# Altium PCB corePCB.PcbDoc (part 1 of 2)
Units mil, origin at the board's own origin, x right, y up, seen from the top; angles counter-clockwise.
Board outline 3543.31 x 3543.31 mil, 4 copper layers (Top Layer, Layer 1, Layer 2, Bottom Layer), stack 23.756 mil thick; 90 components, 158 nets, 640 pads, 386 vias.
Unrouted connection lines stored in the file: 1.
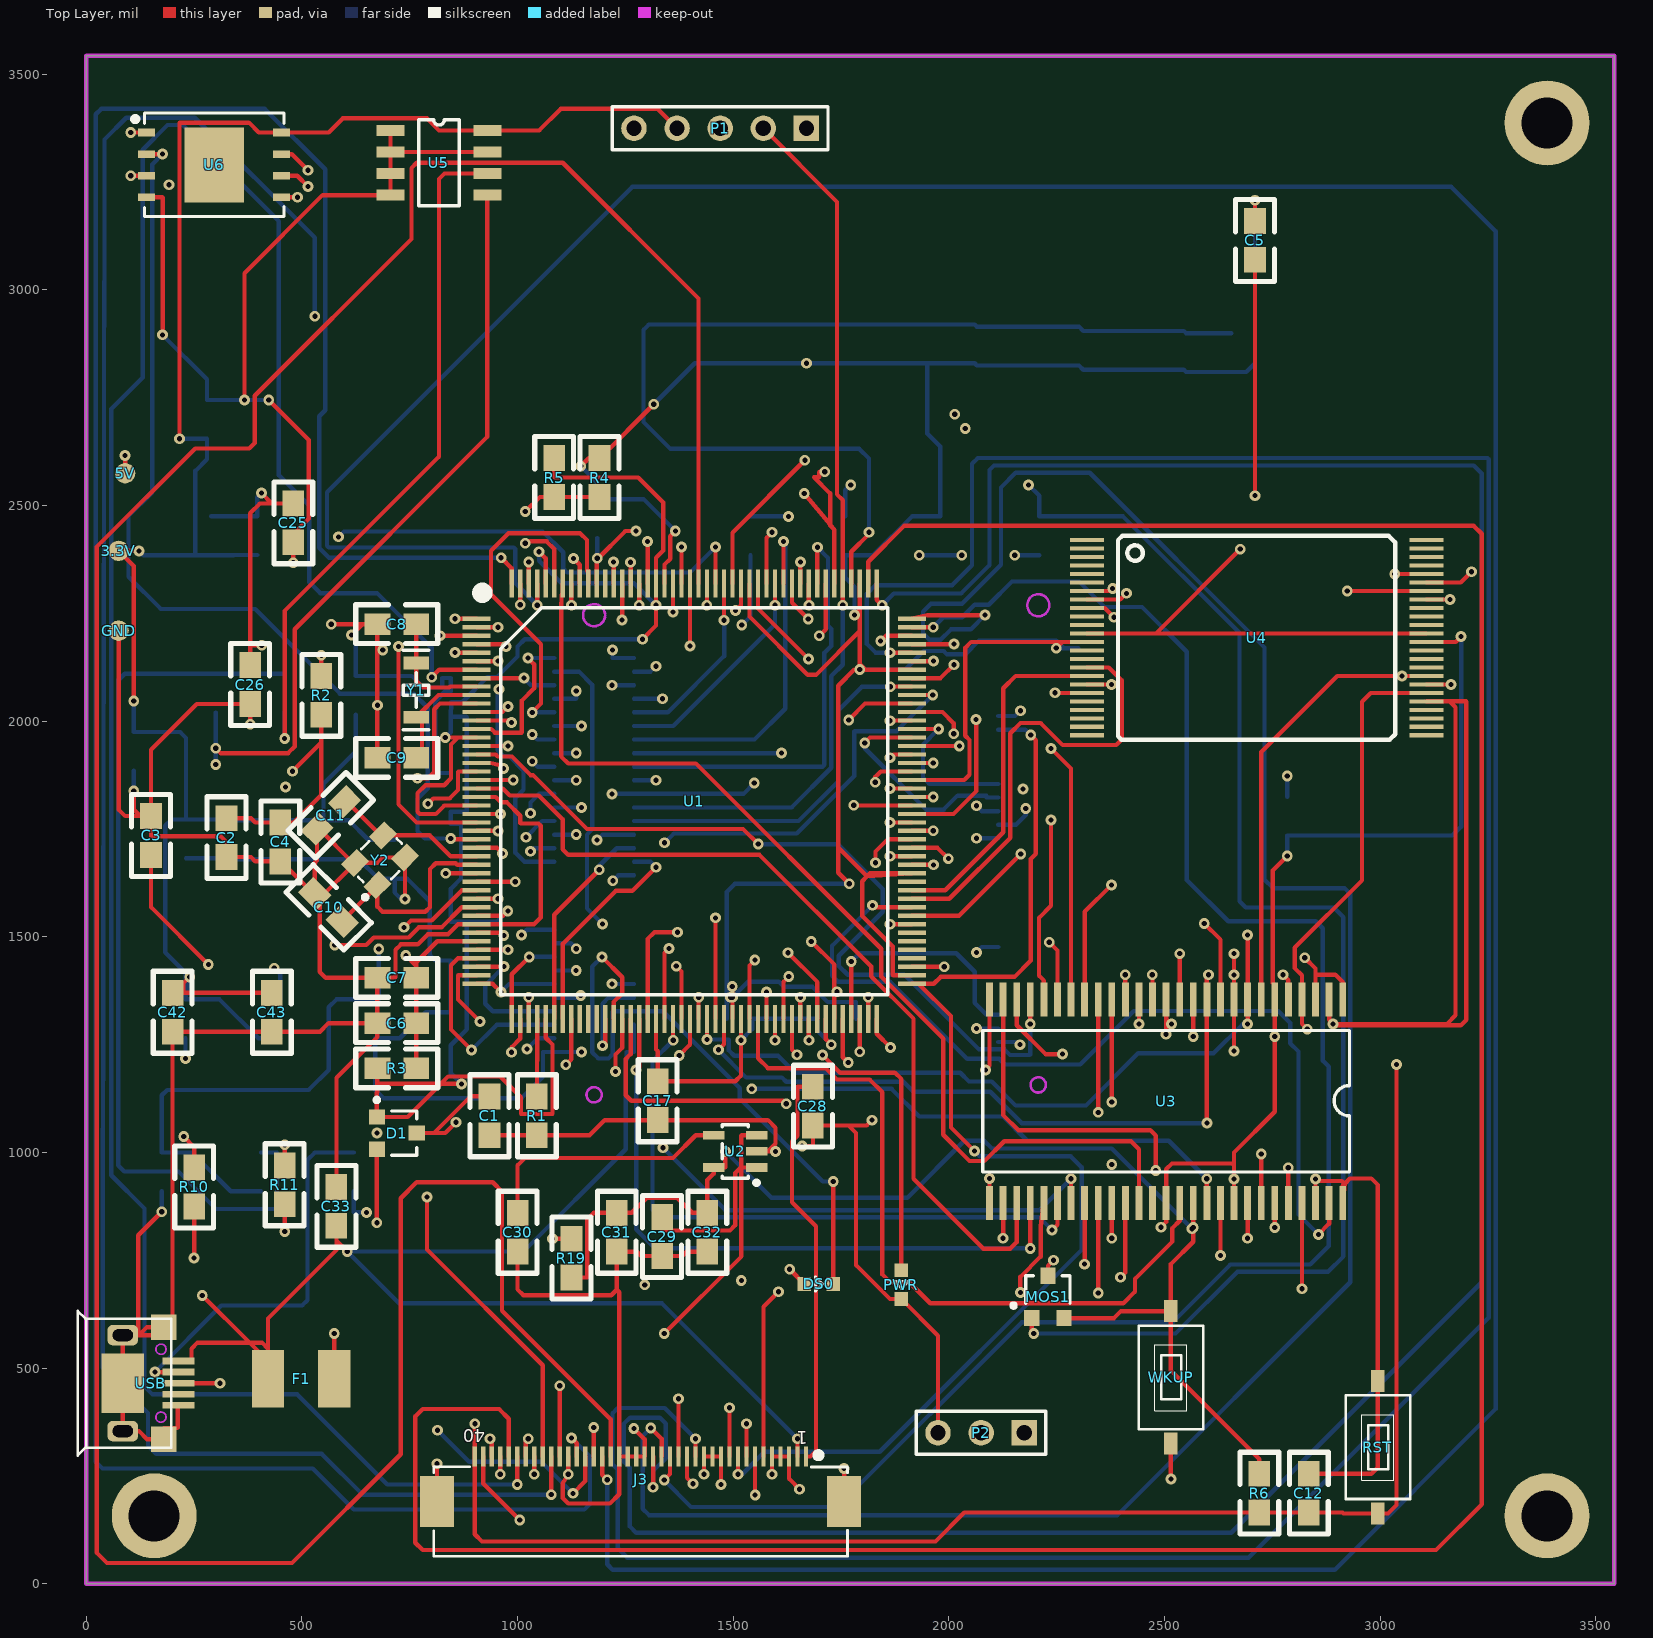
[diagram p0: Top Layer view]
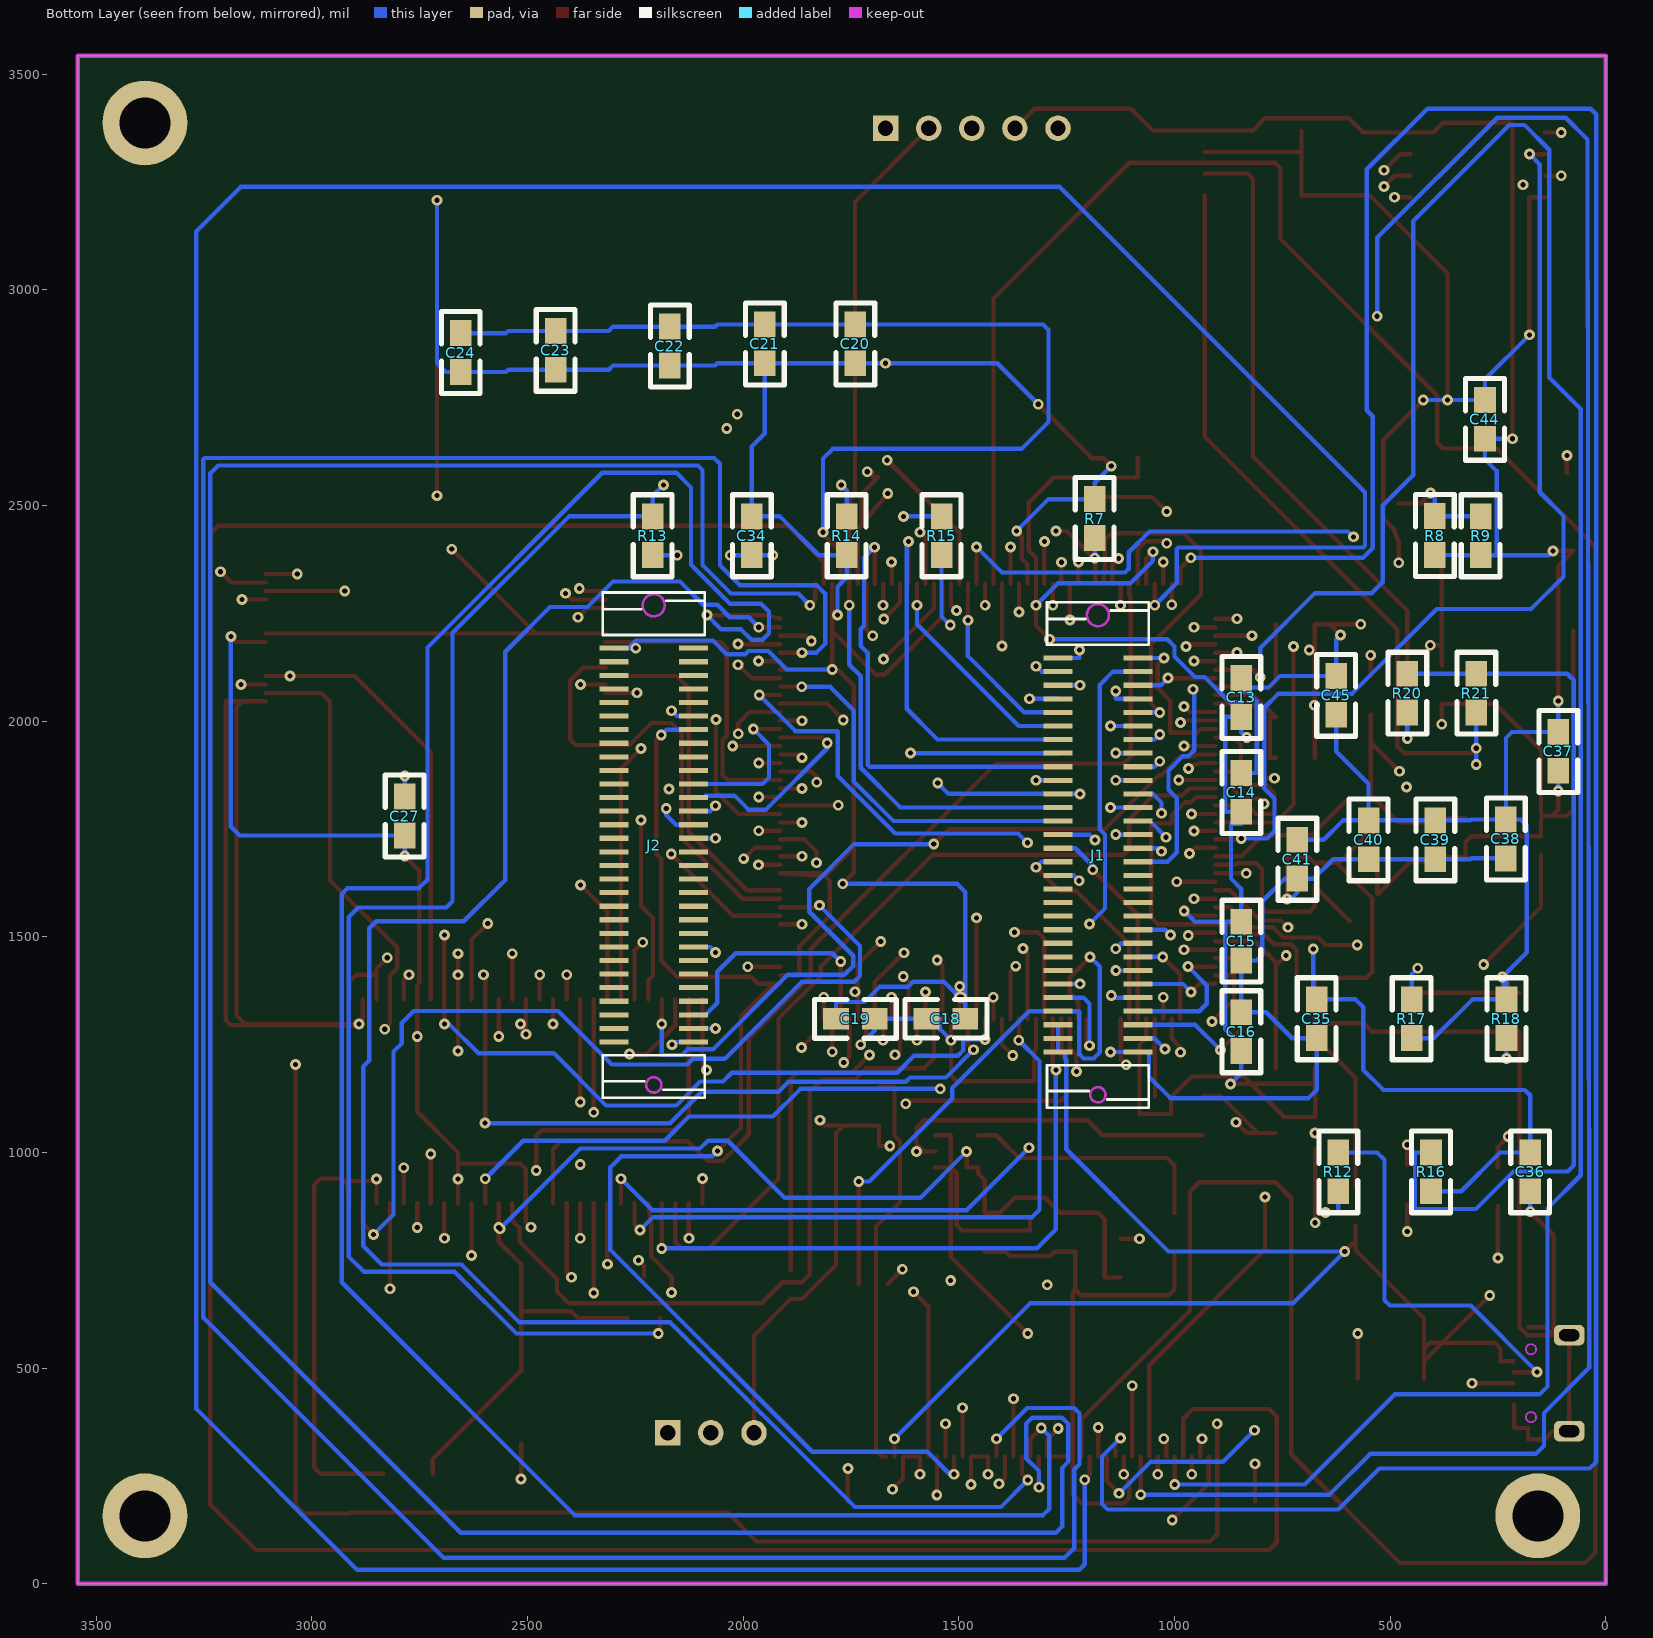
[diagram p1: Bottom Layer view, seen from below]
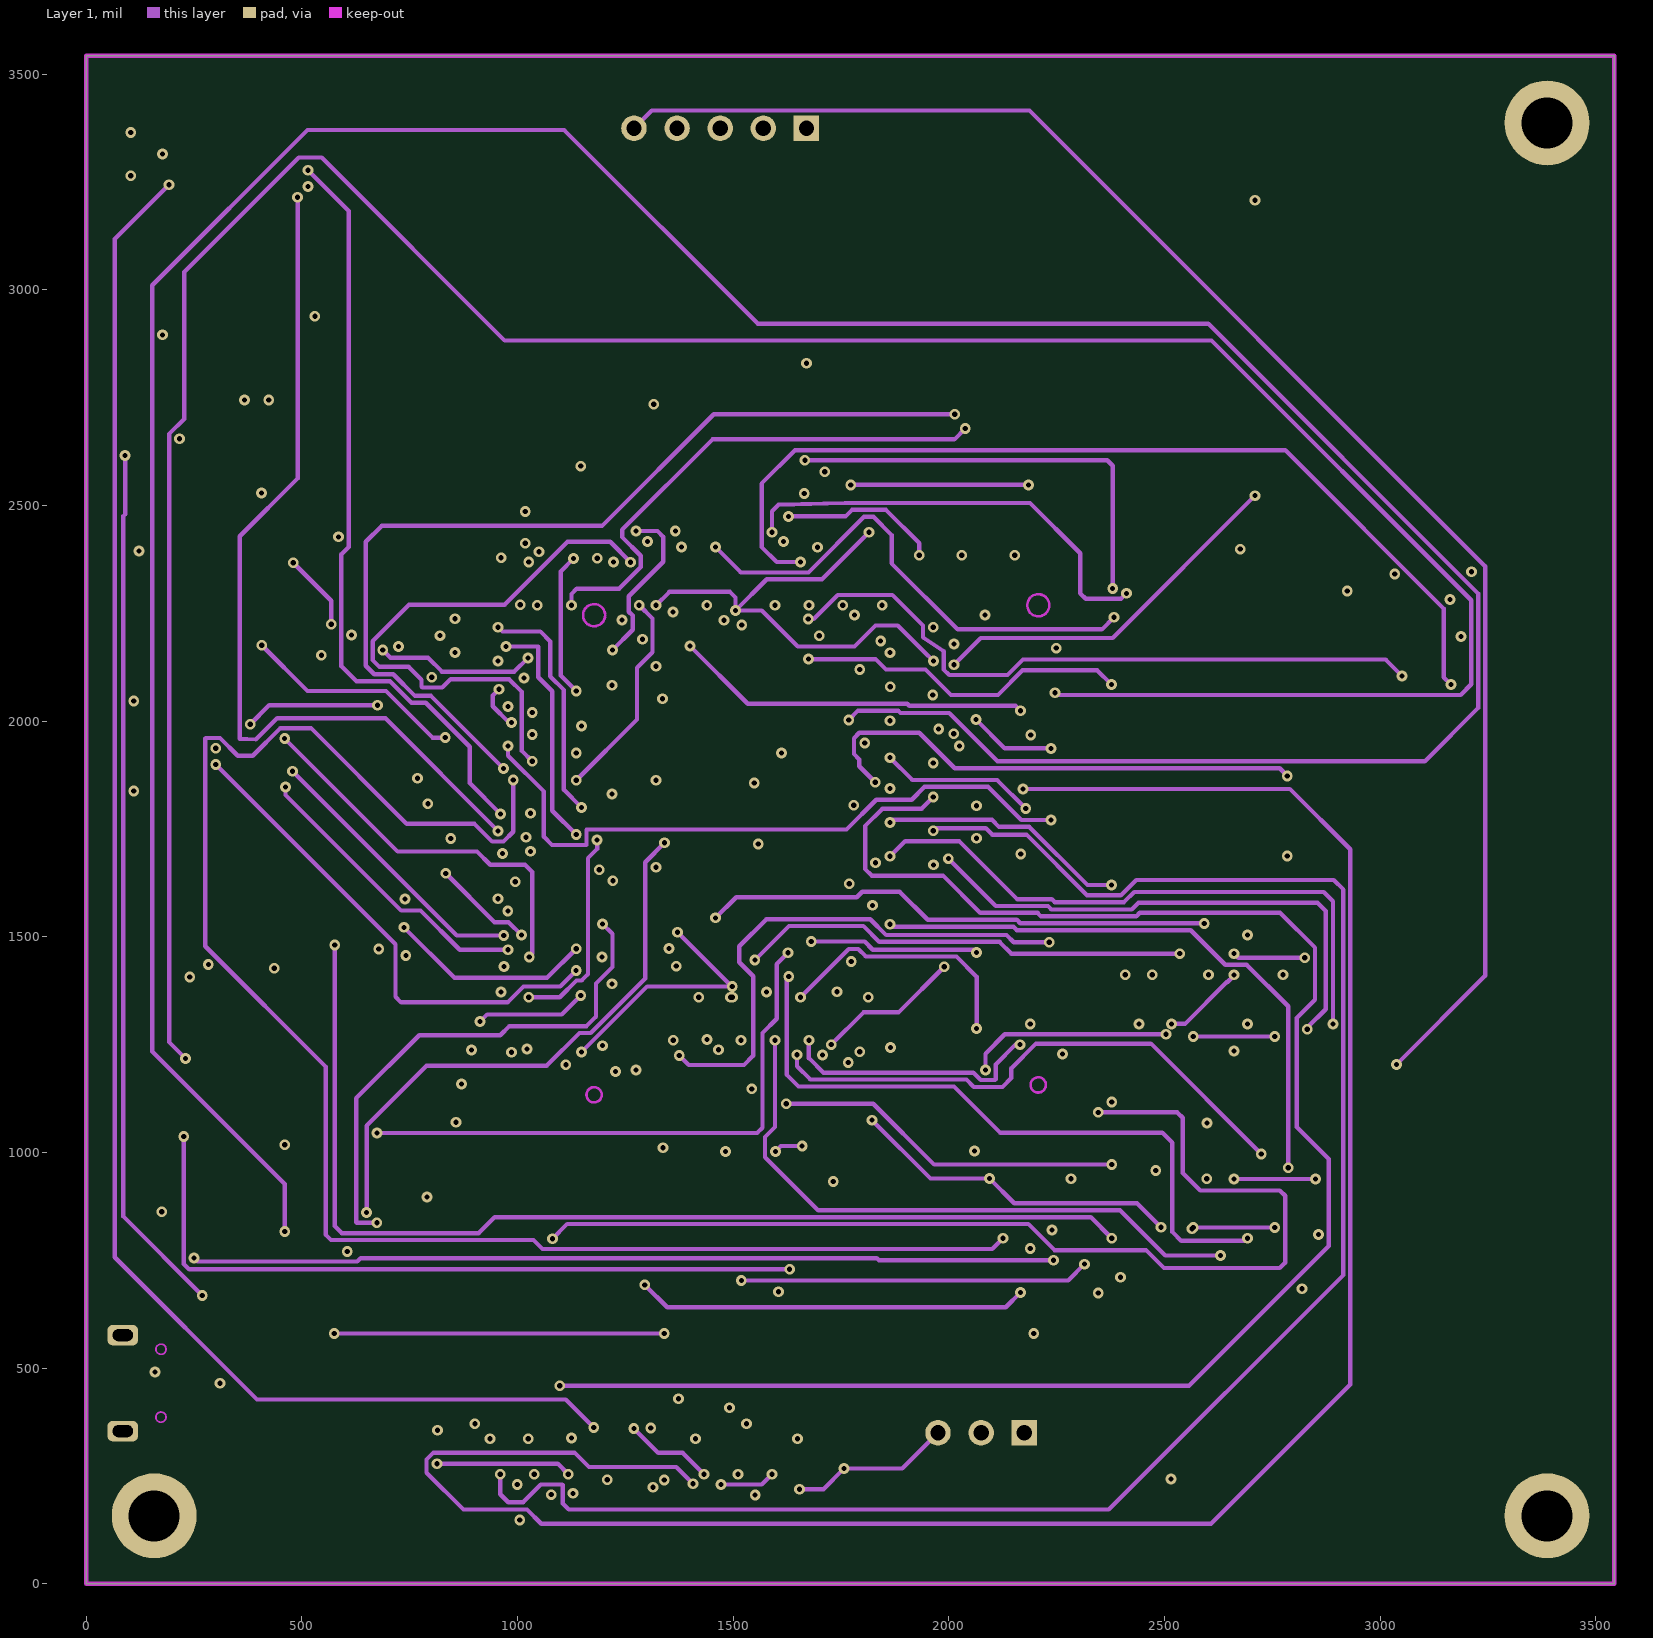
[diagram p2: Layer 1]
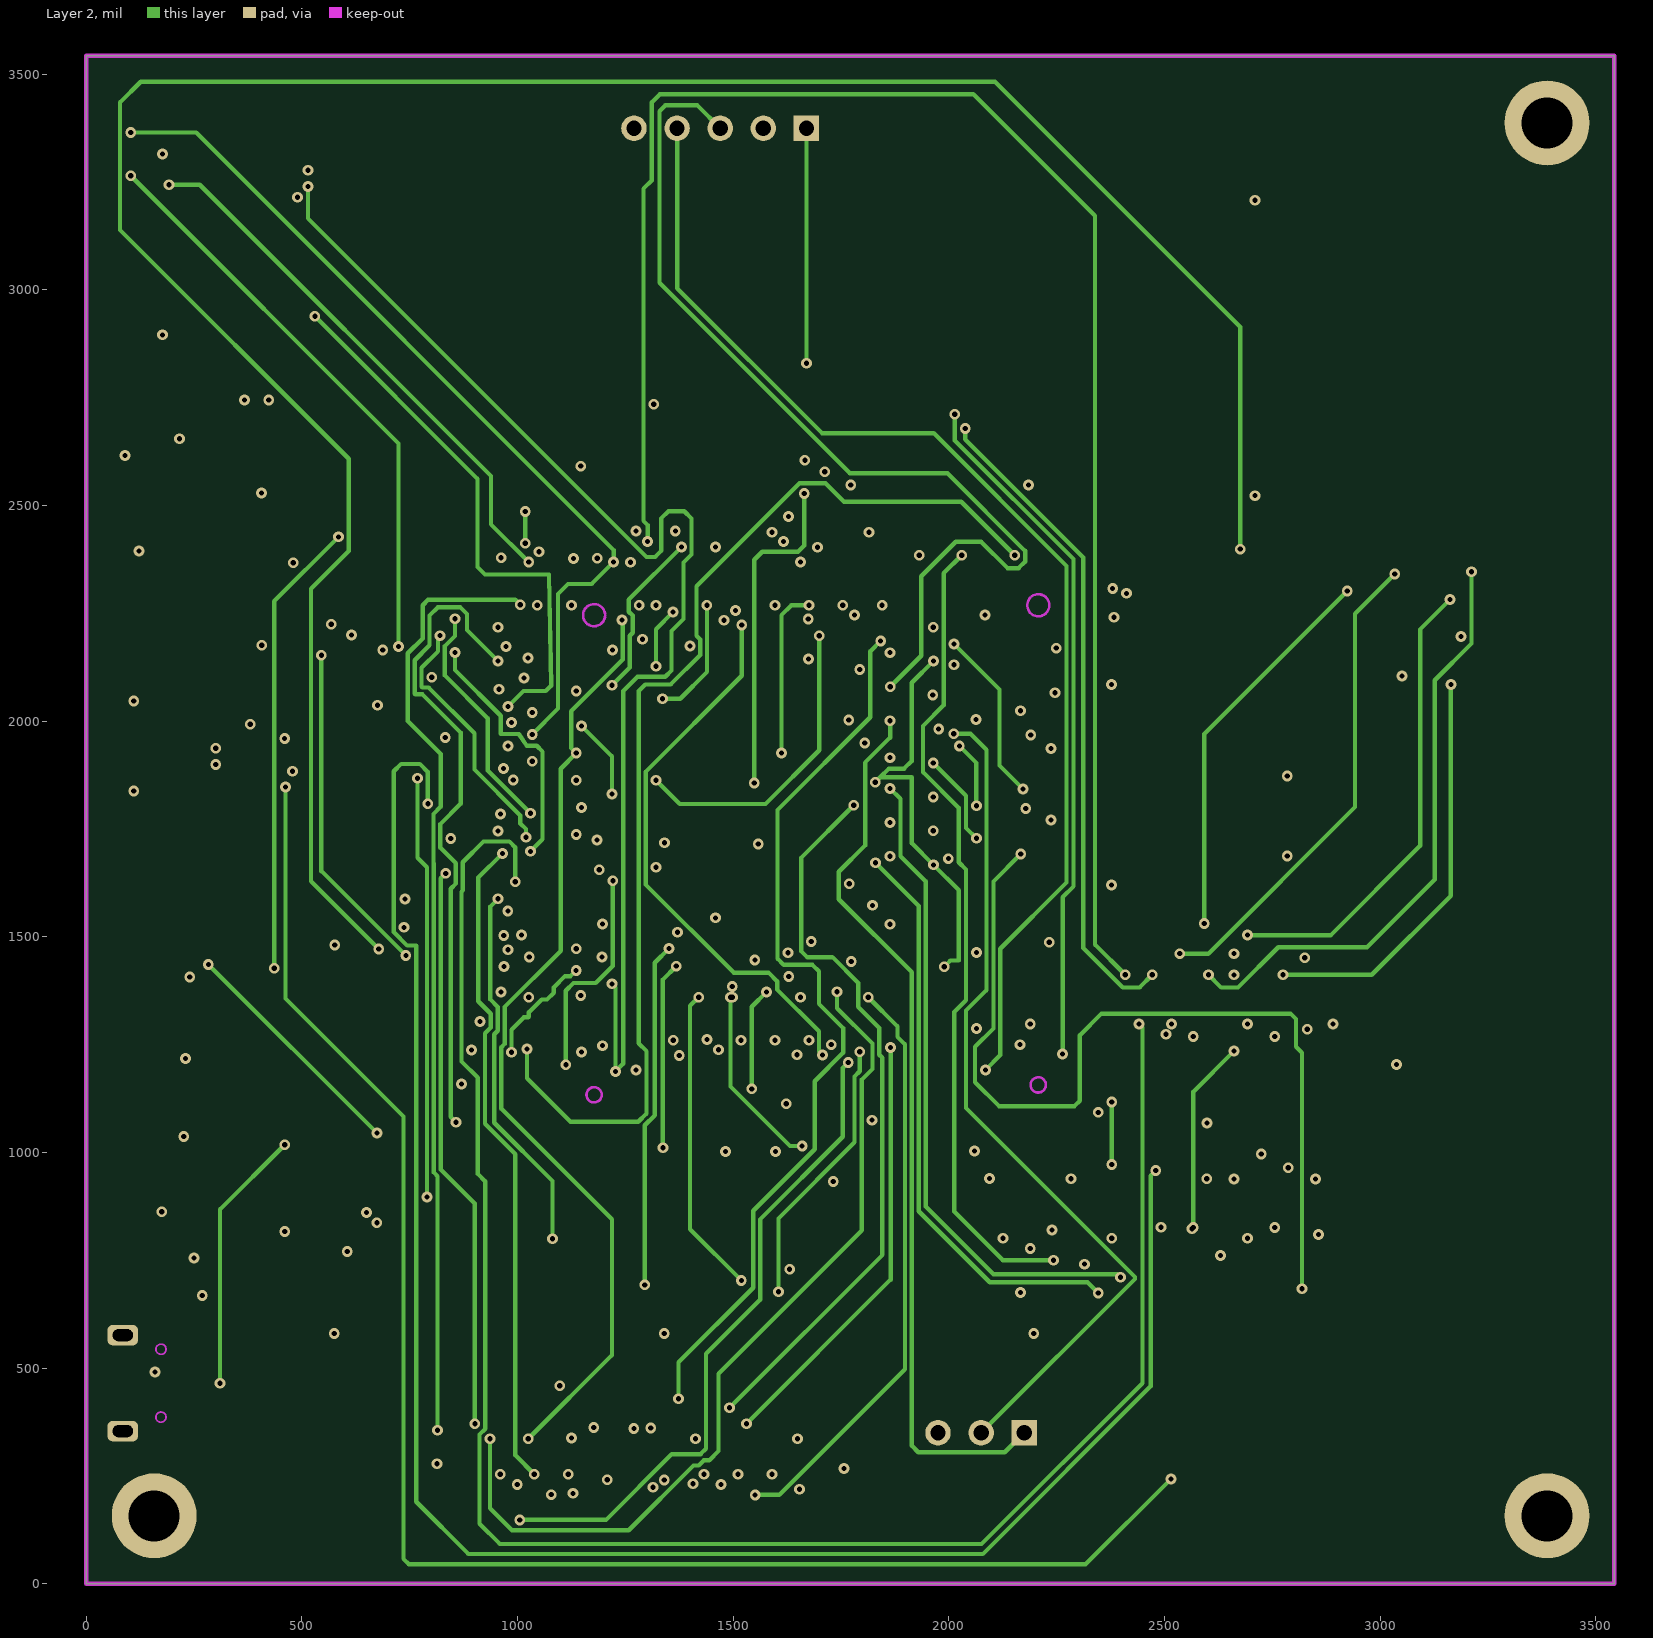
[diagram p3: Layer 2]

## Layer stack, top to bottom
Top Solder: solder mask 0.4, Solder Resist, Dk 3.5
Top Layer: signal copper 1.4
Dielectric1: prepreg 2.8, PP-006, Dk 4.1
Layer 1: signal copper 1.3779
Dielectric2: dielectric 12.6, FR-4, Dk 4.8
Layer 2: signal copper 1.3779
Dielectric3: prepreg 2.8, PP-006, Dk 4.1
Bottom Layer: signal copper 1.4
Bottom Solder: solder mask 0.4, Solder Resist, Dk 3.5

## Board outline
0,0 0,3543.31 3543.31,3543.31 3543.31,0

## Design rules (kind name [scope] priority, off if disabled: settings)
Clearance Clearance_GND [(InPolygon)] p1: gap=20 ignorepadtopadclearanceinfootprint=FALSE except(0: Arc-Hole Track-Hole SMDPad-Hole THPad-Hole Via-Hole Fill-Hole Poly-Hole Region-Hole Text-Hole)
Clearance [All] p2: gap=6 ignorepadtopadclearanceinfootprint=FALSE except(0: Arc-Hole Track-Hole SMDPad-Hole THPad-Hole Via-Hole Fill-Hole Poly-Hole Region-Hole Text-Hole)
ComponentClearance [All] p1: gap=0 collisioncheckmode=3 verticalgap=0 showdistances=FALSE
HoleSize [All] p1: absolutevalues=TRUE maxlimit=1000 minlimit=1 maxpercent=80.000 minpercent=20.000
HoleSize Testpoint [All] p2: absolutevalues=TRUE maxlimit=100 minlimit=1 maxpercent=80.000 minpercent=20.000
HoleSize TestPointUsage [All] p3: absolutevalues=TRUE maxlimit=100 minlimit=1 maxpercent=80.000 minpercent=20.000
Length [All] p1: maxlimit=100000 minlimit=0
MinimumSolderMaskSliver [All] p1: minsoldermaskwidth=0
ParallelSegment ParallelSegment_3 [InNetClass('dcmi') vs InNetClass('dcmi')] p1: limit=10000 gap=10
ParallelSegment ParallelSegment_2 [InNetClass('fmc') vs InNetClass('fmc')] p2: limit=10000 gap=10
ParallelSegment ParallelSegment_1 [InNetClass('spi4') vs InNetClass('spi4')] p3: limit=10000 gap=10
ParallelSegment [InNetClass('qspi') vs InNetClass('qspi')] p4: limit=10000 gap=10
PlaneConnect [All] p1: planeconnectstyle=Direct reliefexpansion=20 reliefentries=4 reliefconductorwidth=10 reliefairgap=10
PolygonConnect [All] p1: connectstyle=Direct reliefconductorwidth=10 reliefentries=4 polygonreliefangle="90 Angle" airgapwidth=10
RoutingVias [All] p1: holewidth=12 width=25 viastyle="Through Hole" minholewidth=8 minwidth=15 maxholewidth=50 maxwidth=50
SilkToSilkClearance [All] p1: silktosilkclearance=0
SilkToSolderMaskClearance SilkscreenOverComponentPads [IsPad] p1: minsilkscreentomaskgap=0 clearancetoexposedcopper=TRUE
SolderMaskExpansion [All] p1: expansion=4
Width [All] p1: maxlimit=100 minlimit=6 preferedwidth=10
24 further rules are at their usual default settings.

## Classes and differential pairs
net class qspi: PB2 PB6 PF6 PF7 PF8 PF9
net class spi4: PE2 PE4 PE5 PE6
net class dcmi: DCMI_D0 DCMI_D1 DCMI_D2 DCMI_D3 DCMI_D4 DCMI_D5 DCMI_D6 DCMI_D7 DCMI_HREF DCMI_PLCK DCMI_SCL DCMI_SDA DCMI_XCLK
net class fmc: FMC_A0 FMC_A1 FMC_A2 FMC_A3 FMC_A4 FMC_A5 FMC_A6 FMC_A7 FMC_A8 FMC_A9 FMC_A10 FMC_A11 FMC_A12 FMC_A16_CLE FMC_A17_ALE FMC_BA0 FMC_BA1 FMC_D0 FMC_D1 FMC_D2 FMC_D3 FMC_D4 FMC_D5 FMC_D6 FMC_D7 FMC_D8 FMC_D9 FMC_D10 FMC_D11 FMC_D12 FMC_D13 FMC_D14 FMC_D15 FMC_NBL0 FMC_NBL1 FMC_NCE3 FMC_NE1 FMC_NOE FMC_NWAIT FMC_NWE FMC_SDCKE0 FMC_SDCLK FMC_SDNCAS FMC_SDNE0 FMC_SDNRAS FMC_SDNWE
component class circuit: 3.3V 5V C28 C29 C30 C31 C32 C33 C34 DS0 F1 GND J3 MOS1 P2 PWR R10 R11 R12 R13 R14 R15 U2 USB WKUP
component class mem: C35 C36 C37 C38 C39 C40 C41 C42 C43 C44 C45 R16 R17 R18 R19 R20 R21 U3 U4 U5 U6
component class stm: C1 C2 C3 C4 C5 C6 C7 C8 C9 C10 C11 C12 C13 C14 C15 C16 C17 C18 C19 C20 C21 C22 C23 C24 C25 C26 C27 D1 J1 J2 P1 R1 R2 R3 R4 R5 R6 R7 R8 R9 RST U1 Y1 Y2

## Components (designator, comment, footprint, x,y, rotation, side; value= is the part's Value field where it differs from the comment)
3.3V "TEST POINT" TP-1.5 75,2395 r90 top
5V "TEST POINT" TP-1.5 90,2575 r0 top
C1 "104" 0805 935,1130 r270 top
C2 "104" 0805 325,1685 r90 top
C3 "225" 0805 150,1690 r90 top
C4 "225" 0805 450,1675 r90 top
C5 "225" 0805 2710,3070 r90 top
C6 "10uF" 0805 675,1300 r0 top
C7 "104" 0805 675,1405 r0 top
C8 "6pF" 0805 675,2225 r0 top
C9 "6pF" 0805 675,1915 r0 top
C10 "22pF" 0805 530,1600 r315 top
C11 "22pF" 0805 535,1750 r45 top
C12 "104" 0805 2835,165 r90 top
C13 "104" 0805 845,2100 r270 bottom
C14 "104" 0805 845,1880 r270 bottom
C15 "104" 0805 845,1445 r90 bottom
C16 "104" 0805 845,1325 r270 bottom
C17 "104" 0805 1325,1075 r90 top
C18 "104" 0805 1485,1310 r0 bottom
C19 "104" 0805 1785,1310 r180 bottom
C20 "104" 0805 1740.06,2830 r90 bottom
C21 "104" 0805 1950,2830 r90 bottom
C22 "104" 0805 2170.06,2825 r90 bottom
C23 "104" 0805 2435,2815 r90 bottom
C24 "104" 0805 2655.06,2810 r90 bottom
C25 "104" 0805 479.94,2415 r90 top
C26 "104" 0805 380,2040 r90 top
C27 "104" 0805 2785.06,1735 r90 bottom
C28 "104" 0805 1684.94,1062.4 r90 top
C29 "10uF" 0805 1335,760 r90 top
C30 "103" 0805 1000,770 r90 top
C31 "104" 0805 1230,770 r90 top
C32 "10uF" 0805 1440,770 r90 top
C33 "104" 0805 580,830 r90 top
C34 "104" 0805 1980.13,2385 r90 bottom
C35 "104" 0805 670.13,1265 r90 bottom
C36 "104" 0805 175.13,910 r90 bottom
C37 "104" 0805 110.06,1885 r90 bottom
C38 "104" 0805 231.45,1681.93 r90 bottom
C39 "104" 0805 395,1680 r90 bottom
C40 "104" 0805 550,1680 r90 bottom
C41 "104" 0805 715,1635 r90 bottom
C42 "104" 0805 200,1280 r90 top
C43 "104" 0805 430,1280 r90 top
C44 "104" 0805 280,2655 r90 bottom
C45 "104" 0805 625,2015 r90 bottom
D1 "BAT54C" SOT-23 715,1045 r270 top
DS0 "LED" SMDLED-0603 1665,695 r0 top
F1 "1812L075PR" *1812 498.23,475 r0 top
GND "TEST POINT" TP-1.5 75,2210 r90 top
J1 "3710M060046G3FT01" 3710F060046G3FT01 1270,1233.07 r0 bottom
J2 "3710M060046G3FT01" 3710F060046G3FT01 2300.04,1256.06 r0 bottom
J3 "RGBLCD" FPC-TOP40 1668.7,299 r180 top
MOS1 "SI2301" SO-G3/C2.5 2230,665 r0 top
P1 "SWD" HDR1X5 1670,3375 r180 top
P2 "USART1" HDR1X3 2175,350 r180 top
PWR "LED" SMDLED-0603 1890,726.93 r270 top
R1 "10K" 0805 1045,1130 r270 top
R2 "10R" 0805 545,2015 r90 top
R3 "10R" 0805 765,1195 r180 top
R4 "0R" 0805 1190,2520 r90 top
R5 "0R" 0805 1085,2520 r90 top
R6 "10K" 0805 2720,165 r90 top
R7 "100K" 0805 1185,2425 r90 bottom
R8 "0R" 0805 396.13,2385.59 r90 bottom
R9 "0R" 0805 290,2385 r90 bottom
R10 "1K" 0805 249.94,875 r90 top
R11 "10R" 0805 460,880 r90 top
R12 "10R" 0805 620.06,910 r90 bottom
R13 "10R" 0805 2210.13,2385 r90 bottom
R14 "100K" 0805 1760.13,2385 r90 bottom
R15 "1K" 0805 1540.13,2385 r90 bottom
R16 "0R" 0805 405.13,910 r90 bottom
R17 "10K" 0805 450.13,1265 r90 bottom
R18 "10K" 0805 230.13,1265 r90 bottom
R19 "10K" 0805 1125,710 r90 top
R20 "4.7K" 0805 460,2020 r90 bottom
R21 "4.7K" 0805 300.13,2020 r90 bottom
RST "KEY_M" KEY_SOP3625 2995,162.91 r90 top
U1 "STM32F767IGT6" LQFP176 905.3,2237.78 r0 top locked
U2 "CAT6219-330TD" SOT-23-5 1555,965 r180 top
U3 "W9825G6KH" TSOP54 2913.43,1355 r270 top
U4 "MT29F4G08" TSOP48 2320,2419.96 r0 top
U5 "24C02" SOP-8 705.59,3370 r0 top
U6 "W25Q256" WSON8 296.5,3290 r0 top
USB "USB-AB" "USB_AB - 5S - B" 0,465 r90 top
WKUP "KEY_UP" KEY_SOP3625 2515,325 r90 top
Y1 "32.768KHz" XTAL3215 765,2135 r270 top
Y2 "25Mhz" XTAL3225 675,1620 r45 top

## Footprints (in the part's own frame and the unit in brackets; to place one, negate y for a bottom-side part, rotate by r counter-clockwise, add the part's x,y. Pads: shape width x height; smd on the part's side, far side on the other; paste and mask are expansions set on the pad)
0805 [mil]
  rect 60x50 smd: 1(0,-0.06) 2(90,-0.06)
  silkscreen extent -50,-45 140,45
3710F060046G3FT01 [mm]
  rect 1.7x0.3 smd: 1(-4.7,0) 2(-4.7,-0.8) 3(-4.7,-1.6) 4(-4.7,-2.4) 5(-4.7,-3.2) 6(-4.7,-4) 7(-4.7,-4.8) 8(-4.7,-5.6) 9(-4.7,-6.4) 10(-4.7,-7.2) 11(-4.7,-8) 12(-4.7,-8.8) 13(-4.7,-9.6) 14(-4.7,-10.4) 15(-4.7,-11.2) 16(-4.7,-12) 17(-4.7,-12.8) 18(-4.7,-13.6) 19(-4.7,-14.4) 20(-4.7,-15.2) 21(-4.7,-16) 22(-4.7,-16.8) 23(-4.7,-17.6) 24(-4.7,-18.4) 25(-4.7,-19.2) 26(-4.7,-20) 27(-4.7,-20.8) 28(-4.7,-21.6) 29(-4.7,-22.4) 30(-4.7,-23.2) 31(0,-23.2) 32(0,-22.4) 33(0,-21.6) 34(0,-20.8) 35(0,-20) 36(0,-19.2) 37(0,-18.4) 38(0,-17.6) 39(0,-16.8) 40(0,-16) 41(0,-15.2) 42(0,-14.4) 43(0,-13.6) 44(0,-12.8) 45(0,-12) 46(0,-11.2) 47(0,-10.4) 48(0,-9.6) 49(0,-8.8) 50(0,-8) 51(0,-7.2) 52(0,-6.4) 53(0,-5.6) 54(0,-4.8) 55(0,-4) 56(0,-3.2) 57(0,-2.4) 58(0,-1.6) 59(0,-0.8) 60(0,0)
  Keep-Out Layer circle w0.152: c-2.35,-25.725 r0.65
  Keep-Out Layer circle w0.152: c-2.35,2.525 r0.45
  silkscreen extent -5.35,-26.48 0.65,3.27
*1812 [mm]
  rect 1.9x3.4 smd: 1(-1.95,0) 2(1.95,0)
FPC-TOP40 [mm]
  rect 0.25x1.2 smd: 1(0,0.102) 2(0.5,0.102) 3(1,0.102) 4(1.5,0.102) 5(2,0.102) 6(2.5,0.102) 7(3,0.102) 8(3.5,0.102) 9(4,0.102) 10(4.5,0.102) 11(5,0.102) 12(5.5,0.102) 13(6,0.102) 14(6.5,0.102) 15(7,0.102) 16(7.5,0.102) 17(8,0.102) 18(8.5,0.102) 19(9,0.102) 20(9.5,0.102) 21(10,0.102) 22(10.5,0.102) 23(11,0.102) 24(11.5,0.102) 25(12,0.102) 26(12.5,0.102) 27(13,0.102) 28(13.5,0.102) 29(14,0.102) 30(14.5,0.102) 31(15,0.102) 32(15.5,0.102) 33(16,0.102) 34(16.5,0.102) 35(17,0.102) 36(17.5,0.102) 37(18,0.102) 38(18.5,0.102) 39(19,0.102) 40(19.5,0.102)
  rect 2x3 smd: A(-2.25,2.754) B(21.725,2.754)
  silkscreen extent -2.45,-0.15 21.92,5.97
HDR1X3 [mm]
  rect 1.5x1.5 hole 0.9: 1(0,0)
  round 1.5 hole 0.9: 2(2.54,0) 3(5.08,0)
  silkscreen extent -1.27,-1.27 6.35,1.27
HDR1X5 [mm]
  rect 1.5x1.5 hole 0.9: 1(0,0)
  round 1.5 hole 0.9: 2(2.54,0) 3(5.08,0) 4(7.62,0) 5(10.16,0)
  silkscreen extent -1.27,-1.27 11.43,1.27
KEY_SOP3625 [mm]
  rect 1.3x0.8 smd: 1(0,0) 2(7.8,0)
  silkscreen extent 0.85,-1.9 6.95,1.9
LQFP176 [mm]
  rect 1.65x0.254 smd: 1(0,0) 2(0,-0.5) 3(0,-1) 4(0,-1.5) 5(0,-2) 6(0,-2.5) 7(0,-3) 8(0,-3.5) 9(0,-4) 10(0,-4.5) 11(0,-5) 12(0,-5.5) 13(0,-6) 14(0,-6.5) 15(0,-7) 16(0,-7.5) 17(0,-8) 18(0,-8.5) 19(0,-9) 20(0,-9.5) 21(0,-10) 22(0,-10.5) 23(0,-11) 24(0,-11.5) 25(0,-12) 26(0,-12.5) 27(0,-13) 28(0,-13.5) 29(0,-14) 30(0,-14.5) 31(0,-15) 32(0,-15.5) 33(0,-16) 34(0,-16.5) 35(0,-17) 36(0,-17.5) 37(0,-18) 38(0,-18.5) 39(0,-19) 40(0,-19.5) 41(0,-20) 42(0,-20.5) 43(0,-21) 44(0,-21.5) 89(25.631,-21.5) 90(25.631,-21) 91(25.631,-20.5) 92(25.631,-20) 93(25.631,-19.5) 94(25.631,-19) 95(25.631,-18.5) 96(25.631,-18) 97(25.631,-17.5) 98(25.631,-17) 99(25.631,-16.5) 100(25.631,-16) 101(25.631,-15.5) 102(25.631,-15) 103(25.631,-14.5) 104(25.631,-14) 105(25.631,-13.5) 106(25.631,-13) 107(25.631,-12.5) 108(25.631,-12) 109(25.631,-11.5) 110(25.631,-11) 111(25.631,-10.5) 112(25.631,-10) 113(25.631,-9.5) 114(25.631,-9) 115(25.631,-8.5) 116(25.631,-8) 117(25.631,-7.5) 118(25.631,-7) 119(25.631,-6.5) 120(25.631,-6) 121(25.631,-5.5) 122(25.631,-5) 123(25.631,-4.5) 124(25.631,-4) 125(25.631,-3.5) 126(25.631,-3) 127(25.631,-2.5) 128(25.631,-2) 129(25.631,-1.5) 130(25.631,-1) 131(25.631,-0.5) 132(25.631,0)
  rect 0.254x1.65 smd: 45(2.065,-23.566) 46(2.566,-23.566) 47(3.066,-23.566) 48(3.565,-23.566) 49(4.066,-23.566) 50(4.565,-23.566) 51(5.066,-23.566) 52(5.565,-23.566) 53(6.066,-23.566) 54(6.565,-23.566) 55(7.066,-23.566) 56(7.565,-23.566) 57(8.066,-23.566) 58(8.565,-23.566) 59(9.066,-23.566) 60(9.565,-23.566) 61(10.066,-23.566) 62(10.565,-23.566) 63(11.066,-23.566) 64(11.565,-23.566) 65(12.066,-23.566) 66(12.565,-23.566) 67(13.066,-23.566) 68(13.565,-23.566) 69(14.066,-23.566) 70(14.565,-23.566) 71(15.066,-23.566) 72(15.566,-23.566) 73(16.066,-23.566) 74(16.566,-23.566) 75(17.065,-23.566) 76(17.566,-23.566) 77(18.065,-23.566) 78(18.566,-23.566) 79(19.065,-23.566) 80(19.566,-23.566) 81(20.065,-23.566) 82(20.566,-23.566) 83(21.065,-23.566) 84(21.566,-23.566) 85(22.065,-23.566) 86(22.566,-23.566) 87(23.065,-23.566) 88(23.566,-23.566) 133(23.566,2.065) 134(23.065,2.065) 135(22.566,2.065) 136(22.065,2.065) 137(21.566,2.065) 138(21.065,2.065) 139(20.566,2.065) 140(20.065,2.065) 141(19.566,2.065) 142(19.065,2.065) 143(18.566,2.065) 144(18.065,2.065) 145(17.566,2.065) 146(17.065,2.065) 147(16.566,2.065) 148(16.066,2.065) 149(15.566,2.065) 150(15.066,2.065) 151(14.565,2.065) 152(14.066,2.065) 153(13.565,2.065) 154(13.066,2.065) 155(12.565,2.065) 156(12.066,2.065) 157(11.565,2.065) 158(11.066,2.065) 159(10.565,2.065) 160(10.066,2.065) 161(9.565,2.065) 162(9.066,2.065) 163(8.565,2.065) 164(8.066,2.065) 165(7.565,2.065) 166(7.066,2.065) 167(6.565,2.065) 168(6.066,2.065) 169(5.565,2.065) 170(5.066,2.065) 171(4.565,2.065) 172(4.066,2.065) 173(3.565,2.065) 174(3.066,2.065) 175(2.566,2.065) 176(2.065,2.065)
  silkscreen extent 0.04,-22.15 24.22,1.82
SMDLED-0603 [mil]
  rect 32x32 smd: 1(0,0) 2(66.93,0)
  silkscreen extent 26,-17 42,17
SO-G3/C2.5 [mm]
  rect 0.9x0.95 smd: 1(-0.95,-1.25) 2(0.95,-1.25) 3(0,1.25)
  silkscreen extent -2.15,-0.63 1.3,1.25
SOP-8 [mil]
  rect 65x25 smd: 1(0,0) 2(0,-50) 3(0,-100) 4(0,-150) 5(224.41,-150) 6(224.41,-100) 7(224.41,-50) 8(224.41,0)
  silkscreen extent 65,-175 159,25
SOT-23 [mm]
  rect 0.9x0.95 smd: 1(-0.95,-1.048) 2(0.95,-1.048) 3(0,1.302)
  silkscreen extent -2.07,-1.17 1.3,1.3
SOT-23-5 [mil]
  rect 50x20 smd: 1(0,0) 2(0,-37.4) 3(0,-74.8) 4(100,-74.8) 5(100,0)
  silkscreen extent 0,-99 80,35
TP-1.5 [mm]
  round 1.2 smd: 1(0,0)
TSOP48 [mm]
  rect 2x0.25 smd: 1(0,0) 2(0,-0.5) 3(0,-1) 4(0,-1.5) 5(0,-2) 6(0,-2.5) 7(0,-3) 8(0,-3.5) 9(0,-4) 10(0,-4.5) 11(0,-5) 12(0,-5.5) 13(0,-6) 14(0,-6.5) 15(0,-7) 16(0,-7.5) 17(0,-8) 18(0,-8.5) 19(0,-9) 20(0,-9.5) 21(0,-10) 22(0,-10.5) 23(0,-11) 24(0,-11.5) 25(20,-11.5) 26(20,-11) 27(20,-10.5) 28(20,-10) 29(20,-9.5) 30(20,-9) 31(20,-8.5) 32(20,-8) 33(20,-7.5) 34(20,-7) 35(20,-6.5) 36(20,-6) 37(20,-5.5) 38(20,-5) 39(20,-4.5) 40(20,-4) 41(20,-3.5) 42(20,-3) 43(20,-2.5) 44(20,-2) 45(20,-1.5) 46(20,-1) 47(20,-0.5) 48(20,0)
  silkscreen extent 1.83,-11.75 18.17,0.25
TSOP54 [mm]
  rect 2x0.4 smd: 1(0,0) 2(0,-0.8) 3(0,-1.6) 4(0,-2.4) 5(0,-3.2) 6(0,-4) 7(0,-4.8) 8(0,-5.6) 9(0,-6.4) 10(0,-7.2) 11(0,-8) 12(0,-8.8) 13(0,-9.6) 14(0,-10.4) 15(0,-11.2) 16(0,-12) 17(0,-12.8) 18(0,-13.6) 19(0,-14.4) 20(0,-15.2) 21(0,-16) 22(0,-16.8) 23(0,-17.6) 24(0,-18.4) 25(0,-19.2) 26(0,-20) 27(0,-20.8) 28(12,-20.8) 29(12,-20) 30(12,-19.2) 31(12,-18.4) 32(12,-17.6) 33(12,-16.8) 34(12,-16) 35(12,-15.2) 36(12,-14.4) 37(12,-13.6) 38(12,-12.8) 39(12,-12) 40(12,-11.2) 41(12,-10.4) 42(12,-9.6) 43(12,-8.8) 44(12,-8) 45(12,-7.2) 46(12,-6.4) 47(12,-5.6) 48(12,-4.8) 49(12,-4) 50(12,-3.2) 51(12,-2.4) 52(12,-1.6) 53(12,-0.8) 54(12,0)
  silkscreen extent 1.83,-21.2 10.16,0.4
"USB_AB - 5S - B" [mm]
  rect 0.4x1.9 smd: 1(1.3,-5.436) 2(0.65,-5.436) 3(0,-5.436) 4(-0.65,-5.436) 5(-1.3,-5.436)
  rrect50% 1.2x1.8 hole 0.7 slot 1.2 at 90 deg: 6(2.825,-2.15) 7(-2.825,-2.15)
  rect 1.5x1.5 smd: 8(-3.302,-4.572) 9(3.302,-4.572)
  rect 3.5x2.5 smd: 9(0,-2.159)
  Keep-Out Layer circle w0.102: c2,-4.4 r0.3
  Keep-Out Layer circle w0.102: c-2,-4.4 r0.3
  silkscreen extent -4.26,-5 4.26,0.51
WSON8 [mm]
  rect 1x0.45 smd: 1(-3.975,1.905) 2(-3.975,0.635) 3(-3.975,-0.635) 4(-3.975,-1.905) 5(3.975,-1.905) 6(3.975,-0.635) 7(3.975,0.635) 8(3.975,1.905)
  rect 3.5x4.4 smd: 9(0,0)
  silkscreen extent -4.8,-3.05 4.1,3.05
XTAL3215 [mm]
  rect 0.75x1.5 smd: 1(0,0) 2(3.2,0)
  silkscreen extent -0.74,-0.75 3.94,0.75
XTAL3225 [mm]
  rect 1.3x1.05 smd: 1(0,0) 2(2.3,0) 3(2.3,1.85) 4(0,1.85)
  silkscreen extent -1.14,-0.33 2.74,2.17

## Part data
3.3V 5V GND: library part TEST-POINT, "测试点"
C1 C2 C3 C4 C5 C6 C7 C8 C9 C10 C11 C12 C13 C14 C15 C16 C17 C18 C19 C20 C21 C22 C23 C24 C25 C26 C27 C28 C29 C30 C31 C32 C33 C34 C35 C36 C37 C38 C39 C40 C41 C42 C43 C44 C45: library part C
D1: "双肖特基二极管"
F1: "PTC Resettable Fuse 0.75A_hold_ 1.5A_trip_ 13.2VDC 100A 0.8W 0.2s 0.1Ohm SMD Solder Pad 1812 T/R", Package="1812 Littelfuse", Availability=Unavailable, MF="Littelfuse Inc.", MP=1812L075PR, Price=None, SnapEDA_Link=https://www.snapeda.com/parts/1812L075PR/Littelfuse%20Inc./view-part/?ref=snap
J1 J2: library part 3710F, "3710F060046G3FT01"
J3: library part FPC-40, "FPC-40P-0.5mm"
MOS1: library part MOS-P, "IRLML6401/SI2301"
P1: library part "Header 5", "Header, 5-Pin", LatestRevisionDate=17-Jul-2002, LatestRevisionNote="Re-released for DXP Platform.", Publisher="Altium Limited"
P2: library part "Header 3", "Header, 3-Pin", LatestRevisionDate=17-Jul-2002, LatestRevisionNote="Re-released for DXP Platform.", Publisher="Altium Limited"
R1 R2 R3 R4 R5 R6 R7 R8 R9 R10 R11 R12 R13 R14 R15 R16 R17 R18 R19 R20 R21: library part R
U2: "3.3V 500mA LDO"
U3: library part IS42S16160B, "32MB SDRAM"
U4: library part K9F2G08U0C, "256MB NAND FLASH"
U5: library part 24C256, "EEPROM"
U6: library part W25Q128, "W25Q128"
USB: "MicroUSB"
WKUP: library part KEY_M
Y1: library part XTAL, "普通晶振", LatestRevisionDate=17-Jul-2002, LatestRevisionNote="Re-released for DXP Platform.", Published=8-Jun-2000, Publisher="Altium Limited"
Y2: library part XTAL_3225, "3225贴片无源晶振"

## Free pads (board coordinates)
  round 196.85 hole 118.11: 0(157.48,157.48) 0(3387.52,157.48) 0(3387.52,3387.52)

## Via types
v1: diameter 25, hole 12, Top Layer to Bottom Layer, 386 vias

## Nets (pads, with @x,y where several pads share a name; then routed paths per layer and width w, separated by ;. In a path a pad name is that pad's centre, name@x,y a point inside that pad or via, vN(x,y) a via of type N, cw(c..) or ccw(c..) an arc to the next point about the centre after c; other vN are vias at no path point)
BOOT0: J1.31 R7.1 U1.166 | length 681
  Top Layer w10: U1.166@1183.47,2319.09 v1@1183.47,2374.47 ; v1(1185,2378) 1183.47,2376.47 v1@1183.47,2374.47 ; v1(1275,2441) 1250,2441 v1@1183.47,2374.47
  Layer 1 w10: v1(1220,2165) 1267,2212 1267,2245 1258,2254 1258,2290 1338,2370 1338,2427.5 1324.5,2441 v1(1275,2441)
  Bottom Layer w10: R7.1@1184.94,2425 1184.94,2378.06 v1(1185,2378) ; v1(1220,2165) 1220,2147.46 1221,2146.46 J1.31@1270,2146.46
DCMI_D0: J2.16 U1.115 | length 316.7
  Top Layer w10: U1.115@1914.39,1903.13 v1(1964,1903.13)
  Layer 2 w10: v1(1964,1903.13) 2040,1827.13 2040,1752.5 v1(2064,1728.5)
  Bottom Layer w10: v1(2064,1728.5) J2.16@2115,1728.5
DCMI_D1: J2.17 U1.116 | length 504.6
  Top Layer w10: v1(1864,1915.5) 1871.32,1922.82 U1.116@1914.39,1922.82
  Layer 1 w10: v1(1864,1915.5) 1915.61,1863.89 2112.11,1863.89 v1(2178.5,1797.5)
  Bottom Layer w10: J2.17@2115,1760 2156,1760 2178.5,1782.5 v1(2178.5,1797.5)
DCMI_D2: J2.18 U1.117 | length 321.2
  Top Layer w10: U1.117@1914.39,1942.5 v1(2024.5,1942.5)
  Layer 2 w10: v1(2024.5,1942.5) 2064,1903 v1(2064,1804)
  Bottom Layer w10: v1(2064,1804) 2076.5,1791.5 J2.18@2115,1791.5
DCMI_D3: J2.19 U1.118 | length 513.8
  Top Layer w10: v1(1805,1949.69) 1817.5,1962.19 U1.118@1914.39,1962.19
  Bottom Layer w10: v1(1805,1949.69) 1805,1937.46 1947.46,1795 1988,1795 2020.5,1827.5 2087.5,1827.5 2087.5,1822.99 J2.19@2115,1822.99
DCMI_D4: J1.39 U1.140 | length 1052.2
  Top Layer w10: U1.140@1695.28,2319.09 v1(1695.28,2403.5)
  Bottom Layer w10: J1.39@1270,1894.49 1706.99,1894.49 1711.51,1899.01 1711.51,2158.55 1727.46,2174.5 1727.46,2214.04 1720,2221.5 1720,2378.78 v1(1695.28,2403.5)
DCMI_D5: J1.36 U1.145 | length 518.9
  Top Layer w10: U1.145@1596.85,2319.09 1596.85,2269.15 v1(1597,2269)
  Bottom Layer w10: J1.36@1270,1988.98 1361,1988.98 1597,2224.98 v1(1597,2269)
DCMI_D6: J1.26 U1.167 | length 832.1
  Top Layer w10: v1(1034,2020.47) 1054.5,2040.97 1054.5,2178.5 938.5,2294.5 938.5,2395.5 979,2436 1145,2436 1161,2420 1161,2349 1163.78,2349 U1.167@1163.78,2319.09
  Bottom Layer w10: v1(1034,2020.47) J1.26@1084.96,2020.47
DCMI_D7: J1.27 U1.168 | length 466.6
  Top Layer w10: v1(1130,2377) 1144.1,2362.9 U1.168@1144.1,2319.09
  Layer 1 w10: v1(1130,2377) 1100,2347 1100,2106 v1(1136,2070)
  Bottom Layer w10: J1.27@1084.96,2051.97 1135,2051.97 1136,2052.97 v1(1136,2070)
DCMI_HREF: J2.3 U1.85 | length 583.2
  Top Layer w10: U1.85@1774.02,1310 v1(1774.02,1442.5)
  Bottom Layer w10: v1(1774.02,1442.5) 1793.52,1462 2017.46,1462 2060.25,1419.21 2060.25,1346.81 2088,1319.06 J2.3@2115,1319.06
DCMI_PLCK: J1.47 U1.52 | length 667.8
  Top Layer w10: v1(1112,1203.41) 1124.41,1215.82 U1.52@1124.41,1310
  Layer 2 w10: v1(1112,1203.41) 1112,1375 1129.85,1392.85 1181.35,1392.85 1221,1432.5 v1(1221,1630.02)
  Bottom Layer w10: v1(1221,1630.02) 1233.5,1642.52 J1.47@1270,1642.52
DCMI_RESET: J1.25 J1.41 U1.138 U1.165 | length 1770.9
  Top Layer w10: v1(1665,2528) 1724.84,2455.81 ; v1(1712.34,2578.29) 1701,2578.29 1699.84,2577.14 1699.84,2567 1698.64,2565.79 1687.34,2565.79 1724.84,2528.29 1724.84,2455.81 ; U1.138@1734.65,2319.09 1734.65,2443.99 ; 1724.84,2455.81 1724.84,2453.79 1734.65,2443.99 ; 1724.84,2455.81 1734.65,2443.99
  Layer 2 w10: v1(1148.52,1989) 1219,1918.52 v1(1219,1831) ; v1(1549,1856.5) 1549,2374.27 1567.5,2392.77 1650.27,2392.77 1665,2407.5 v1(1665,2528)
  Bottom Layer w10: J1.25@1084.96,1988.98 v1(1148.52,1989) ; v1(1219,1831) 1219.5,1831.5 J1.41@1270,1831.5 1524,1831.5 v1(1549,1856.5)
DCMI_SCL: J1.22 U1.162 | length 1435.7
  Top Layer w10: U1.162@1262.21,2319.09 v1(1262.21,2368.79)
  Layer 1 w10: v1(1034,1906.99) 1010,1930.99 1010,2068 980.5,2097.5 844.77,2097.5 825.5,2078.23 779,2078.23 777.5,2079.73 777.5,2096 747.53,2125.97 680,2125.97 664,2141.97 664,2185.5 748.5,2270 970,2270 1116,2416 1215,2416 v1(1262.21,2368.79)
  Bottom Layer w10: v1(1034,1906.99) 1046.5,1894.49 J1.22@1084.96,1894.49
DCMI_SDA: J1.21 U1.161 | length 593.3
  Top Layer w10: U1.161@1281.89,2319.09 1281.89,2269.11 v1(1282,2269)
  Layer 1 w10: v1(1136,1862.99) 1277,2003.99 1277,2124 1313,2160 1313,2238 v1(1282,2269)
  Bottom Layer w10: J1.21@1084.96,1862.99 v1(1136,1862.99)
DCMI_XCLK: J2.20 U1.119 | length 370.8
  Top Layer w10: U1.119@1914.39,1981.87 v1(1976.5,1981.87)
  Bottom Layer w10: v1(1976.5,1981.87) 1940,1945.37 1940,1869.49 1955,1854.49 J2.20@2115,1854.49
ETH_MDC: J1.9 U1.33 | length 735.5
  Top Layer w10: v1(737,1522) 753,1538 801,1538 870.85,1607.85 U1.33@905.3,1607.85
  Layer 1 w10: v1(737,1522) 853.96,1405.04 1068.5,1405.04 v1(1136,1472.54)
  Bottom Layer w10: J1.9@1084.96,1485.04 1123.5,1485.04 v1(1136,1472.54)
ETH_MDIO: J1.4 U1.42 | length 334.5
  Top Layer w10: U1.42@905.3,1430.69 968.19,1430.69 v1(968.5,1431)
  Bottom Layer w10: v1(968.5,1431) 925,1387.5 925,1345 942.44,1327.56 J1.4@1084.96,1327.56
FMC_A0: U1.16 U3.23 | length 2041.5
  Top Layer w10: U1.16@905.3,1942.5 v1(978,1942.5) ; U3.23@2220.51,1355 2220.51,1398.49 2209,1410 2209,1544 2237,1572 v1(2237,1771)
  Layer 1 w10: v1(978,1942.5) 978,1920 1061,1837 1061,1732 1080,1713 1159,1713 1160,1714 1160,1748 1161,1749 1763,1749 1832,1818 1914,1818 1943.89,1847.89 2091.11,1847.89 2168,1771 v1(2237,1771)
FMC_A1: U1.17 U3.24 | length 1949.6
  Top Layer w10: U1.17@905.3,1922.82 949.18,1922.82 954,1918 987,1918 1030,1875 1036,1875 1161,1750 1523,1750 v1(1558,1715) ; v1(2189,1298) U3.24@2189.02,1355
  Bottom Layer w10: v1(1558,1715) 1743,1715 1847,1611 1847,1558 1745,1456 1745,1432.5 1765.5,1412 1897,1412 2070,1239 2129,1239 2142,1226 2188,1226 2189,1227 v1(2189,1298)
FMC_A2: U1.18 U3.25 | length 4062.6
  Top Layer w10: U1.18@905.3,1903.13 938.17,1903.13 960.03,1897.97 v1(967.5,1890.5) ; U3.25@2157.52,1355 2157.52,1295 2224.52,1228 v1(2264,1228)
  Layer 1 w10: v1(967.5,1890.5) 799.26,2058.74 762,2058.74 711.74,2109 667.5,2109 648,2128.5 648,2416 685,2453 1196,2453 1455,2712 v1(2014,2712)
  Layer 2 w10: v1(2014,2712) 2014,2651 2289,2376 2289,1617 2264,1592 v1(2264,1228)
FMC_A3: U1.19 U3.26 | length 5205.9
  Top Layer w10: v1(792,1808.5) 804.5,1821 842.5,1821 861.81,1840.31 861.81,1882.26 863,1883.45 U1.19@905.3,1883.45 ; U3.26@2126.02,1355 2126.02,1087 2161.52,1051.5 2467.5,1051.5 2480,1039 v1(2480,958)
  Layer 2 w10: v1(792,1808.5) 792,1882.5 773.5,1901 730,1901 713,1884 713,1511 744,1480 764,1480 765,1479 765,190 886,69 2079,69 2467.98,457.98 2467.98,945.98 v1(2480,958)
FMC_A4: U1.20 U3.29 | length 4024.2
  Top Layer w10: U1.20@905.3,1863.76 v1(990.24,1863.76) ; v1(2126.02,801.02) U3.29@2126.02,882.56
  Layer 1 w10: v1(990.24,1863.76) 990.24,1743.74 967.5,1721 941,1721 900,1762 743,1762 521,1984 450,1984 386,1920 351,1920 310.06,1960.94 277,1960.94 276,1959.94 276,1478 555,1199 555,809.5 567.5,797 1037,797 1058,776 2101,776 v1(2126.02,801.02)
FMC_A5: U1.21 U3.30 | length 2062.5
  Top Layer w10: U1.21@905.3,1844.08 965.66,1844.08 981.98,1827.76 1049.24,1827.76 1104.5,1772.5 1104.5,1703 1117.5,1690 1561,1690 1820,1431 1820,1408.37 1918,1310.37 1918,939 2080,777 2142.5,777 2157.52,792.02 U3.30@2157.52,882.56
FMC_A6: U1.60 U3.31 | length 1528.3
  Top Layer w10: v1(1275,1191) 1281.89,1197.89 U1.60@1281.89,1310 ; v1(2189.02,777.52) U3.31@2189.02,882.56
  Bottom Layer w10: v1(1275,1191) 1275,822 1319.48,777.52 v1(2189.02,777.52)
FMC_A7: U1.63 U3.32 | length 2104.5
  Top Layer w10: U1.63@1340.95,1310 1340.95,1462.95 v1(1351,1473) ; v1(2166,675) 2166,711.5 2213,758.5 2213,829.49 U3.32@2220.51,882.56
  Layer 1 w10: v1(1295,693) 1347,641 2132,641 v1(2166,675)
  Layer 2 w10: v1(1295,693) 1295,1063 1318,1086 1318,1440 v1(1351,1473)
FMC_A8: U1.64 U3.33 | length 1476.7
  Top Layer w10: U1.64@1360.63,1310 1360.63,1260.37 v1(1361,1260) ; v1(2239.51,820) 2252.01,832.5 U3.33@2252.01,882.56
  Bottom Layer w10: v1(1361,1260) 1313,1212 1313,867 1330,850 2209.51,850 v1(2239.51,820)
FMC_A9: U1.65 U3.34 | length 1654.2
  Top Layer w10: v1(1368,1432) 1380.32,1419.68 U1.65@1380.32,1310 ; U3.34@2283.5,882.56 v1(2283.5,939)
  Layer 2 w10: v1(1337,1011) 1337,1401 v1(1368,1432)
  Bottom Layer w10: v1(1337,1011) 1482,866 2210.5,866 v1(2283.5,939)
FMC_A10: U1.66 U3.22 | length 1459.5
  Top Layer w10: v1(1375,1225) 1400,1250 U1.66@1400,1310 ; v1(2233.01,1487.5) 2252.01,1468.5 U3.22@2252.01,1355
  Layer 1 w10: v1(1375,1225) 1397,1203 1525,1203 1546.5,1224.5 1546.5,1408.5 1514,1441 1514,1478 1577,1541 1818.01,1541 1854.76,1504.25 2133.89,1504.25 2150.64,1487.5 v1(2233.01,1487.5)
FMC_A11: U1.67 U3.35 | length 1718
  Top Layer w10: U1.67@1419.69,1310 1419.69,1359.69 v1(1420,1360) ; v1(2315,741) U3.35@2315,882.56
  Layer 1 w10: v1(1519,703) 2277,703 v1(2315,741)
  Layer 2 w10: v1(1420,1360) 1400,1340 1400,822 v1(1519,703)
FMC_A12: U1.106 U3.36 | length 1675.2
  Top Layer w10: v1(1830,1672) 1830,1698 1857.97,1725.97 U1.106@1914.39,1725.97 ; v1(2346.5,674) U3.36@2346.5,882.56
  Layer 2 w10: v1(1830,1672) 1930.39,1571.61 1930.39,863.61 2095,699 2321.5,699 v1(2346.5,674)
FMC_A16_CLE: U1.99 U4.16 | length 1054.5
  Top Layer w10: U1.99@1914.39,1588.17 2001.17,1588.17 2142.5,1729.5 2142.5,1972 2166.5,1996 2213,1996 2264,1945 2388.5,1945 2401,1957.5 2401,2094.69 2371,2124.69 U4.16@2320,2124.69
FMC_A17_ALE: U1.100 U4.17 | length 807.3
  Top Layer w10: U1.100@1914.39,1607.85 1992,1607.85 2126.5,1742.35 2126.5,2076.5 2155,2105 U4.17@2320,2105
FMC_BA0: U1.108 U3.20 | length 919.6
  Top Layer w10: v1(1864,1765) 1864.34,1765.34 U1.108@1914.39,1765.34 ; U3.20@2315,1355 2315,1558 v1(2377,1620)
  Layer 1 w10: v1(1864,1765) 1870.41,1771.41 2100.09,1771.41 2116.5,1755 2186.5,1755 2321.5,1620 v1(2377,1620)
FMC_BA1: U1.109 U3.21 | length 1141
  Top Layer w10: U1.109@1914.39,1785.02 2011.02,1785.02 2064,1838 2064,2003 v1(2063,2004) ; v1(2237,1937) 2283.5,1890.5 U3.21@2283.5,1355
  Layer 1 w10: v1(2063,2004) 2130,1937 v1(2237,1937)
FMC_D0: U1.104 U3.2 U4.29 | length 3686.1
  Top Layer w10: v1(1864,1687) 1864.41,1686.59 U1.104@1914.39,1686.59 ; U3.2@2881.93,1355 2881.93,1307.5 v1@2891.43,1298 ; v1(2891,1298) v1@2891.43,1298 ; U4.29@3107.4,2045.95 3161.55,2045.95 ; v1@2891.43,1298 3155,1298 3175,1318 3175,2032.5 3161.55,2045.95 ; v1@2891.43,1298 2894.43,1295 3187.5,1295 3200,1307.5 3200,2045.11 3199.17,2045.95 3161.55,2045.95
  Layer 1 w10: v1(1864,1687) 1899,1722 2024,1722 2158.5,1587.5 2238.89,1587.5 2245.89,1580.5 2406.5,1580.5 2430,1604 2869.5,1604 2891,1582.5 v1(2891,1298)
FMC_D1: U1.105 U3.4 U4.30 | length 2319.2
  Top Layer w10: U1.105@1914.39,1706.28 1974,1706.28 v1(1999,1681.28) ; v1(2831.44,1285.63) 2818.94,1298.13 U3.4@2818.94,1355 2818.94,1410.87 2801.93,1427.87 2801.93,1474.87 2958,1630.94 2958,2045 2978.63,2065.63 U4.30@3107.4,2065.63
  Layer 1 w10: v1(1999,1681.28) 2108.78,1571.5 2229.89,1571.5 2237.89,1563.5 2424.5,1563.5 2440,1579 2855,1579 2874,1560 2874,1332.19 2831.44,1289.63 v1(2831.44,1285.63)
FMC_D2: U1.142 U3.5 U4.31 | length 3324.4
  Top Layer w10: U1.142@1655.91,2319.09 v1(1655.91,2369) ; v1(2774.94,1412) 2787.44,1399.5 U3.5@2787.44,1355 ; U4.31@3107.4,2085.32 v1(3164.27,2085.32)
  Layer 1 w10: v1(1655.91,2369) 1601,2369 1566,2404 1566,2551 1643.5,2628.5 2780.5,2628.5 3147.45,2261.55 3147.45,2102.14 v1(3164.27,2085.32)
  Layer 2 w10: v1(2774.94,1412) 2981,1412 3164.27,1595.27 v1(3164.27,2085.32)
FMC_D3: U1.143 U3.7 U4.32 | length 2671.7
  Top Layer w10: U1.143@1636.22,2319.09 1636.22,2274.78 v1(1674,2237) ; U3.7@2724.45,1355 2724.45,1928.45 2901,2105 v1(3051,2105) U4.32@3107.4,2105
  Layer 1 w10: v1(1674,2237) 1686.88,2237 1742.5,2292.62 1869.16,2292.62 1940,2221.78 1940,2195 1988,2162 1988,2120 2001,2107 2136,2107 2172,2143 3013,2143 v1(3051,2105)
FMC_D4: U1.68 U3.8 U4.41 | length 2804.4
  Top Layer w10: v1(1439.37,1262) U1.68@1439.37,1310 ; v1(2692.95,1298) U3.8@2692.95,1355 v1(2692.95,1504) ; U4.41@3107.4,2282.17 v1(3162.5,2282.17)
  Layer 2 w10: v1(2692.95,1504) 2886,1504 3093,1711 3093,2212.67 v1(3162.5,2282.17)
  Bottom Layer w10: v1(1439.37,1262) 1489,1262 1490,1261 1490,1236.63 1502.47,1224.15 1603.85,1224.15 1643,1185 2026.5,1185 2047,1164.5 2099.5,1164.5 2155,1109 2318,1109 2439,1230 2614,1230 2682,1298 v1(2692.95,1298)
FMC_D5: U1.69 U3.10 U4.42 | length 2706
  Top Layer w10: U1.69@1459.06,1310 v1(1459.06,1544.06) ; v1(2592.46,1531) 2629.96,1493.5 U3.10@2629.96,1355 ; v1(2924,2301.85) U4.42@3107.4,2301.85
  Layer 1 w10: v1(1459.06,1544.06) 1507,1592 1786.71,1592 1799.19,1604.48 1886.02,1604.48 1951,1539.5 2157.89,1539.5 2165.89,1531.5 2591.96,1531.5 v1(2592.46,1531)
  Layer 2 w10: v1(2592.46,1531) 2592.46,1970.31 v1(2924,2301.85)
FMC_D6: U1.70 U3.11 U4.43 | length 3130.3
  Top Layer w10: v1(1466,1238) 1478.74,1250.74 U1.70@1478.74,1310 ; v1(2598.47,1068) U3.11@2598.47,1355 2598.47,1408.47 v1(2602,1412) ; U4.43@3107.4,2321.54 3187,2321.54 v1(3212,2346.54)
  Layer 2 w10: v1(2602,1412) 2631.5,1382.5 2670.5,1382.5 2764,1476 2970,1476 3127,1633 3127,2095 3212,2180 v1(3212,2346.54)
  Bottom Layer w10: v1(1466,1238) 1530,1174 1613,1174 1623,1164 1895,1164 1918,1141 2096,1141 2169,1068 v1(2598.47,1068)
FMC_D7: U1.73 U3.13 U4.44 | length 2490.7
  Top Layer w10: U1.73@1537.8,1310 1537.8,1433.5 v1(1550.3,1446) ; U3.13@2535.47,1355 v1(2535.47,1461) ; v1(3034,2341.22) U4.44@3107.4,2341.22
  Layer 1 w10: v1(1550.3,1446) 1629.3,1525 1802.01,1525 1838.76,1488.25 2117.89,1488.25 2145.14,1461 v1(2535.47,1461)
  Layer 2 w10: v1(2535.47,1461) 2602,1461 2942,1801 2942,2249.22 v1(3034,2341.22)
FMC_D8: U1.74 U3.42 | length 1707.8
  Top Layer w10: U1.74@1557.48,1310 1557.48,1218.52 1580.5,1195.5 1714.33,1195.5 1740.83,1169 1816.5,1169 1846,1139.5 1846,717 1864,699 1908.5,699 1957,650.5 2404.9,650.5 2431.69,677.29 2431.69,706.88 2518.47,793.66 2518.47,824.5 2535.47,841.5 U3.42@2535.47,882.56
FMC_D9: U1.75 U3.44 | length 1498.6
  Top Layer w10: U1.75@1577.17,1310 v1(1577.17,1372) ; v1(2598,939) 2598.47,938.53 U3.44@2598.47,882.56
  Layer 2 w10: v1(1543,1147.5) 1543,1337.83 v1(1577.17,1372)
  Bottom Layer w10: v1(1543,1147.5) 1867.5,1147.5 1931.5,1083.5 2125.5,1083.5 2182,1027 2510,1027 v1(2598,939)
FMC_D10: U1.76 U3.45 | length 1602.6
  Top Layer w10: U1.76@1596.85,1310 1596.85,1260.15 v1(1597,1260) ; v1(2629.96,761) U3.45@2629.96,882.56
  Layer 1 w10: v1(1597,1260) 1597,1059 1574,1036 1574,989 1697,866 2397,866 2502,761 v1(2629.96,761)
FMC_D11: U1.77 U3.47 | length 1766.7
  Top Layer w10: U1.77@1616.54,1310 1616.54,1395.54 v1(1629,1408) ; v1(2692.95,801) U3.47@2692.95,882.56
  Layer 1 w10: v1(1629,1408) 1624,1403 1624,1180.5 1651.5,1153 2012,1153 2119,1046 2495,1046 2518.47,1022.53 2518.47,815.53 2539,795 2686.95,795 v1(2692.95,801)
FMC_D12: U1.78 U3.48 | length 1486
  Top Layer w10: U1.78@1636.22,1310 1636.22,1238.22 v1(1648,1226.44) ; U3.48@2724.45,882.56 v1(2724.45,996.55)
  Layer 1 w10: v1(1648,1226.44) 1648,1200 1679,1169 2041,1169 2058,1152 2124.5,1152 2145,1172.5 2145,1195 2202.41,1252.41 2468.59,1252.41 v1(2724.45,996.55)
FMC_D13: U1.96 U3.50 | length 1508.8
  Top Layer w10: v1(1864,1529) 1864.11,1529.11 U1.96@1914.39,1529.11 ; v1(2787,964.44) 2787.44,964 U3.50@2787.44,882.56
  Layer 1 w10: v1(1864,1529) 1869.5,1523.5 2149.89,1523.5 2157.89,1515.5 2560.87,1515.5 2641,1435.37 2690.63,1435.37 2787,1339 v1(2787,964.44)
FMC_D14: U1.97 U3.51 | length 2664.9
  Top Layer w10: U1.97@1914.39,1548.8 2023.8,1548.8 v1(2167,1692) ; U3.51@2818.94,882.56 2818.94,684.06 v1(2819,684)
  Layer 2 w10: v1(2167,1692) 2103.5,1628.5 2103.5,1287.5 2061,1245 2061,1162.79 2116.29,1107.5 2291.5,1107.5 2304,1120 2304,1272 2354,1322 2792.5,1322 2805,1309.5 2805,1245 2819,1231 v1(2819,684)
FMC_D15: U1.98 U3.53 | length 2106.6
  Top Layer w10: v1(1823,1573) 1827.52,1568.48 U1.98@1914.39,1568.48 ; v1(2857,810) 2881.93,834.93 U3.53@2881.93,882.56
  Bottom Layer w10: v1(1823,1573) 1729,1479 1729,1409.5 1742.5,1396 1864,1396 2043,1217 2117,1217 2130,1204 2305,1204 2429,1328 2764,1328 2792,1300 2792,1253 2811,1234 2811,856 v1(2857,810)
FMC_NBL0: U1.169 U3.15 | length 2845.4
  Top Layer w10: U1.169@1124.41,2319.09 1124.41,2269.59 v1(1125,2269) ; v1(2472,1412) 2472.48,1411.52 U3.15@2472.48,1355
  Layer 1 w10: v1(1125,2269) 1125,2295 1137.5,2307.5 1235.71,2307.5 1285.71,2357.5 1285.71,2383.81 1242.5,2427.02 1242.5,2444.13 1451.87,2653.5 2013,2653.5 v1(2038,2678.5)
  Layer 2 w10: v1(2038,2678.5) 2038,2653.5 2312,2379.5 2312,1474 2403.5,1382.5 2442.5,1382.5 v1(2472,1412)
FMC_NBL1: U1.170 U3.39 | length 2452.5
  Top Layer w10: U1.170@1104.73,2319.09 1104.73,2293 1102,2293 1102,2276 1101,2275 1101,1918.5 1117.5,1902 1413.5,1902 1843.25,1472.25 1843.25,1407.75 1987,1264 1987,1041 2048,980 2082.5,980 2128.5,1026 2422.48,1026 2440.98,1007.5 U3.39@2440.98,882.56
FMC_NCE3: R17.2 U1.152 U4.9 | length 3422.1
  Top Layer w10: v1(1459,2403.89) 1459.06,2403.83 U1.152@1459.06,2319.09 ; U4.9@2320,2262.48 2361.52,2262.48 v1(2383,2241)
  Layer 1 w10: v1(1459,2403.89) 1517.89,2345 1674.5,2345 1803.5,2474 1825.5,2474 1867.5,2432 1867.5,2366.06 2020.56,2213 2355,2213 v1(2383,2241)
  Layer 2 w10: v1(436,1427) 436,2278.5 v1(585,2427.5)
  Bottom Layer w10: v1(436,1427) 450.06,1412.94 R17.2@450.06,1355 ; v1(585,2427.5) 597.5,2440 1058,2440 1106,2392 1106,2354 1115,2345 1400.11,2345 v1(1459,2403.89)
FMC_NE1: J1.35 U1.151 | length 431.3
  Top Layer w10: U1.151@1478.74,2319.09 1478.74,2234.26 v1(1479,2234)
  Bottom Layer w10: J1.35@1270,2020.47 1348.49,2020.47 1479,2150.99 v1(1479,2234)
FMC_NOE: U1.146 U4.8 | length 1251
  Top Layer w10: U1.146@1577.17,2319.09 1577.17,2425.17 v1(1590,2438) ; U4.8@2320,2282.17 2397.67,2282.17 v1(2412,2296.5)
  Layer 1 w10: v1(1590,2438) 1590,2487 1605,2502 1759.5,2506 2188.5,2506 2305,2389.5 2305,2296.5 2317.5,2284 2399.5,2284 v1(2412,2296.5)
FMC_NWAIT: U1.150 U4.7 | length 1421.4
  Top Layer w10: U1.150@1498.43,2319.09 1498.43,2437.22 v1(1666.21,2605) ; U4.7@2320,2301.85 2373.85,2301.85 v1(2380,2308)
  Layer 1 w10: v1(1666.21,2605) 2367.5,2605 2380,2592.5 v1(2380,2308)
FMC_NWE: U1.147 U4.18 | length 1054.6
  Top Layer w10: U1.147@1557.48,2319.09 1557.48,2261.44 v1(1674.92,2144) ; U4.18@2320,2085.32 2376.68,2085.32 v1(2377,2085)
  Layer 1 w10: v1(1674.92,2144) 1830,2144 1854.2,2119.8 1946.2,2119.8 2005,2061 2114,2061 2171,2118 2344,2118 v1(2377,2085)
FMC_SDCKE0: U1.35 U3.37 | length 2943
  Top Layer w10: v1(576,1481) 649,1481 666.5,1498.5 747.5,1498.5 771,1522 824,1522 870.48,1568.48 U1.35@905.3,1568.48 ; v1(2377.99,801) U3.37@2377.99,882.56
  Layer 1 w10: v1(576,1481) 576,829.5 592.5,813 910,813 947,850 2328.99,850 v1(2377.99,801)
FMC_SDCLK: U1.112 U3.38 | length 1750.6
  Top Layer w10: v1(1864,1844) 1864.08,1844.08 U1.112@1914.39,1844.08 ; v1(2398.49,710.5) 2409.49,721.5 U3.38@2409.49,882.56
  Layer 2 w10: v1(1864,1844) 1888,1820 1888,1687 1946.39,1628.61 1946.39,874.61 2103.5,717.5 2391.49,717.5 v1(2398.49,710.5)
FMC_SDNCAS: U1.160 U3.17 | length 4126.6
  Top Layer w10: U1.160@1301.58,2319.09 v1(1301.58,2416.5) ; v1(2409,1412) 2409.49,1411.51 U3.17@2409.49,1355
  Layer 2 w10: v1(1301.58,2416.5) 1301.58,2454.92 1292,2464.5 1292,3235 1311,3254 1311,3435 1330,3454 2057,3454 2339,3172 2339,1482 v1(2409,1412)
FMC_SDNE0: R19.2 U1.34 U3.19 | length 3721.8
  Top Layer w10: U1.34@905.3,1588.17 v1(955,1588.17) ; v1(1081,800) R19.2@1125.06,800 ; v1(2346.5,1093) U3.19@2346.5,1355
  Layer 1 w10: v1(1081,800) 1115,834 2184.5,834 2245,773.5 2457.5,773.5 2499,732 2767.5,732 2780,744.5 2780,899.5 2767.5,912 2583,912 2542.5,952.5 2542.5,1080.5 2530,1093 v1(2346.5,1093)
  Layer 2 w10: v1(955,1588.17) 937,1570.17 937,1354.5 954,1337.5 954,1282 946,1274 946,1069 1081,934 v1(1081,800)
FMC_SDNRAS: U1.59 U3.18 | length 1758.6
  Top Layer w10: U1.59@1262.21,1310 1262.21,1228 1251,1216.79 1251,1132.5 1263.5,1120 1616,1120 v1(1623,1113) ; v1(2378,1117) U3.18@2377.99,1355
  Layer 1 w10: v1(1623,1113) 1825,1113 1966,972 v1(2378,972)
  Layer 2 w10: v1(2378,972) v1(2378,1117)
FMC_SDNWE: U1.32 U3.16 | length 4483.8
  Top Layer w10: U1.32@905.3,1627.54 v1(994.5,1627.54) ; v1(2440.98,1298.02) U3.16@2440.98,1355
  Layer 2 w10: v1(994.5,1627.54) 994.5,1707.5 981,1721 921,1721 873,1673 873,1607.72 870,1604.72 870,1211.12 908,1173.12 908,950 925,933 925,359 912,346 912,139 959,92 2076,92 2449,465 2449,1290 v1(2440.98,1298.02)
GBC_KEY: J1.15 U1.13 | length 706.1
  Top Layer w10: U1.13@905.3,2001.56 981.44,2001.56 v1(986,1997)
  Layer 1 w10: v1(957,2074) 942.5,2059.5 942.5,2034.5 980,1997 v1(986,1997)
  Bottom Layer w10: v1(957,2074) 954,2071 954,1932.5 967.5,1919 980,1919 1014,1885 1014,1841 995,1822 995,1695 1015.98,1674.02 J1.15@1084.96,1674.02
GBC_LED: J1.45 U1.50 | length 495.6
  Top Layer w10: U1.50@1085.04,1310 1085.04,1551.06 v1(1189.5,1655.51)
  Bottom Layer w10: v1(1189.5,1655.51) 1189.5,1665.01 1230,1705.51 J1.45@1270,1705.51